# Altium PCB STLinkUART.PcbDoc
Units mil, origin at the board's own origin, x right, y up, seen from the top; angles counter-clockwise.
Board outline 1982 x 570.55 mil, 2 copper layers (Top Layer, Bottom Layer); 66 components, 52 nets, 253 pads, 75 vias.
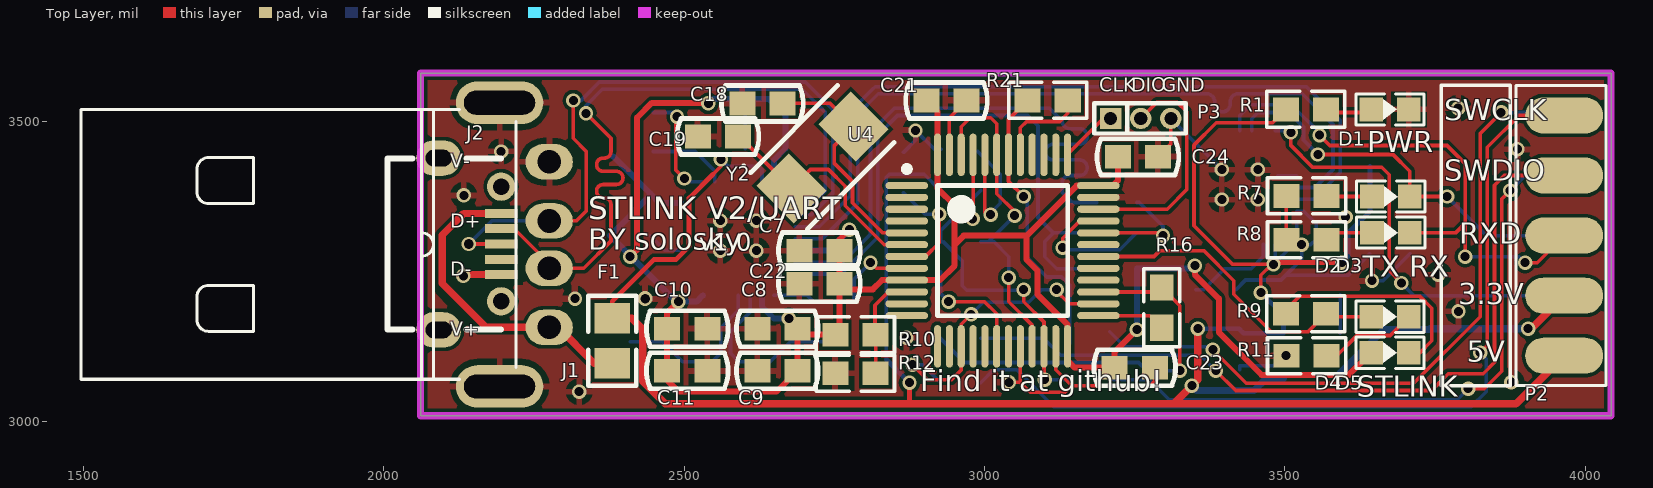
[diagram p0: Top Layer view]
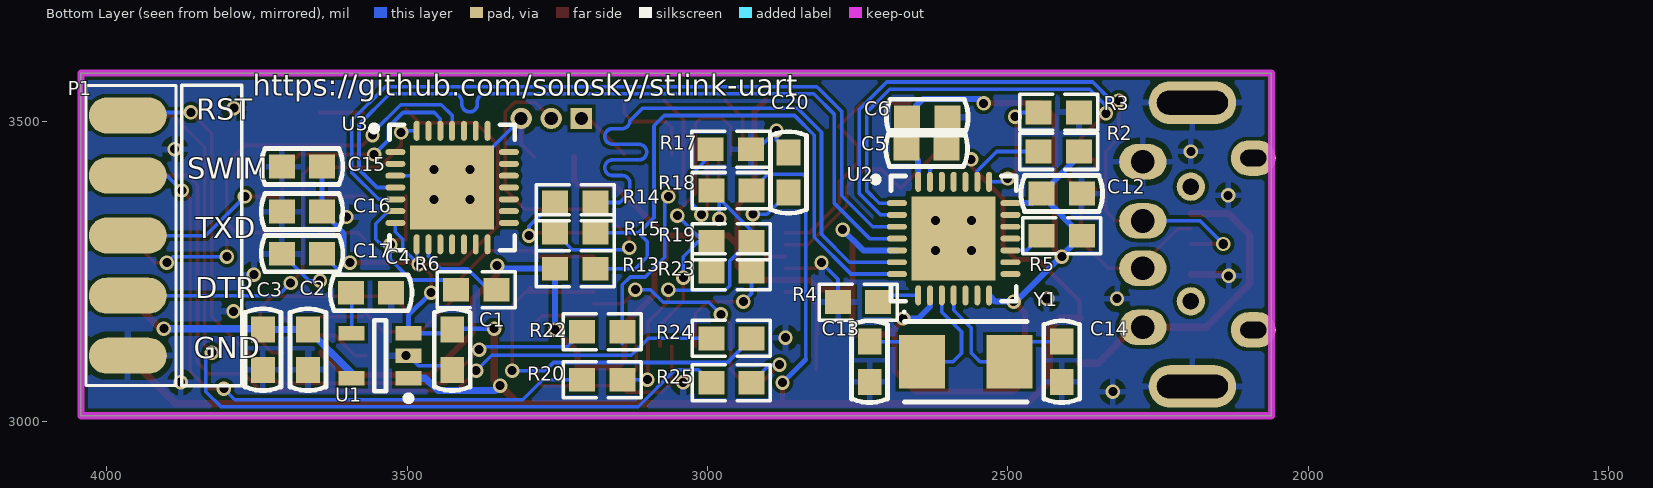
[diagram p1: Bottom Layer view, seen from below]
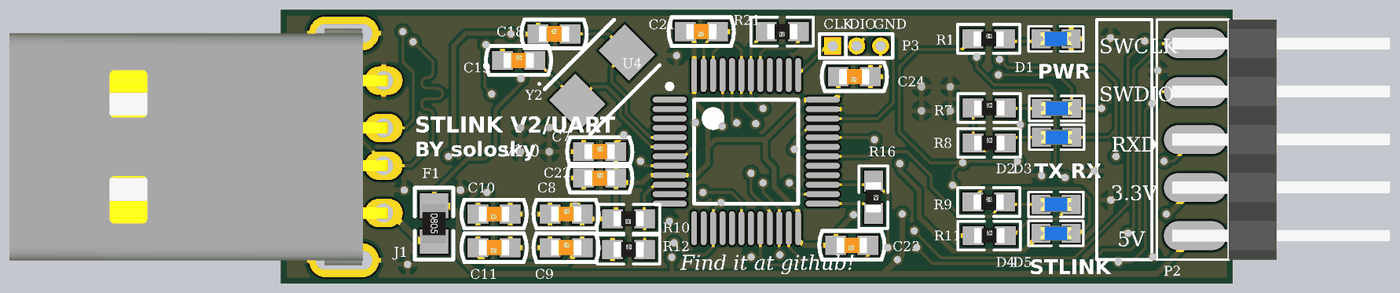
[diagram p2: 3D render of the assembled board from above, using the file's embedded part models]
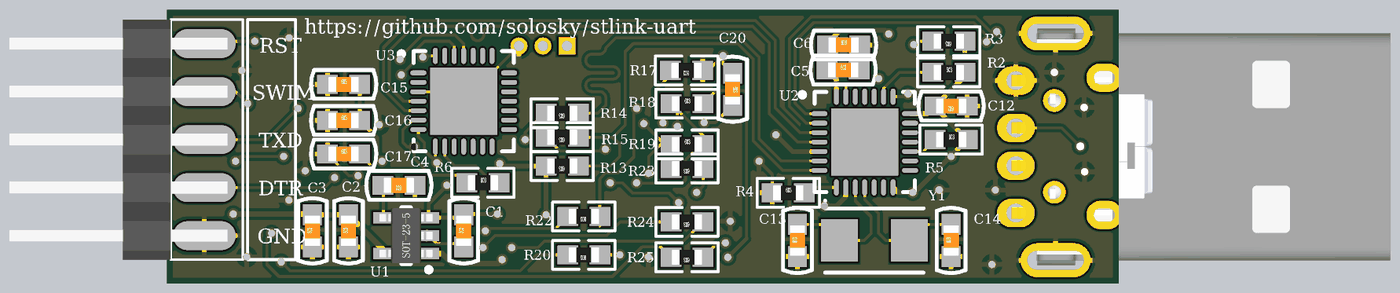
[diagram p3: 3D render of the assembled board from below, using the file's embedded part models]

## Layer stack, top to bottom
Top Solder: solder mask 0.4, Solder Resist, Dk 3.5
Top Layer: signal copper 1.4
Dielectric 1: dielectric 12.6, FR-4, Dk 4.8
Bottom Layer: signal copper 1.4
Bottom Solder: solder mask 0.4, Solder Resist, Dk 3.5

## Board outline
2061,3010 4043,3010 4043,3580.55 2061,3580.55

## Design rules (kind name [scope] priority, off if disabled: settings)
Clearance [All] p1: gap=6
ComponentClearance [All] p1 off: gap=10 collisioncheckmode=3 verticalgap=10 showdistances=FALSE
DiffPairsRouting [All] p1: maxlimit=10 minlimit=6 mostfreqgap=6 toplayer_minwidth=6 toplayer_maxwidth=15 toplayer_prefwidth=6 bottomlayer_minwidth=6 bottomlayer_maxwidth=15 bottomlayer_prefwidth=6 maxuncoupledlength=500
Height [All] p1 off: minheight=0 maxheight=1000 prefheight=500
MatchedLengths USB [InNetClass('USB')] p1: tolerance=5 checknetsindiffpair=TRUE checkdiffpairvsdiffpair=TRUE checkothers=TRUE
MinimumSolderMaskSliver [All] p1: minsoldermaskwidth=3
PolygonConnect [All] p1: connectstyle=Relief reliefconductorwidth=10 reliefentries=4 polygonreliefangle="90 Angle" airgapwidth=10
RoutingVias [All] p1: holewidth=15 width=24 viastyle="Through Hole" minholewidth=15 minwidth=24 maxholewidth=15 maxwidth=24
SilkToSilkClearance [All] p1: silktosilkclearance=1
SilkToSolderMaskClearance [IsPad] p1: minsilkscreentomaskgap=1 clearancetoexposedcopper=TRUE
SolderMaskExpansion [All] p1: expansion=4
UnpouredPolygon [All] p1: allowunpoured=FALSE
Width [All] p1: maxlimit=12 minlimit=6 preferedwidth=6
23 further rules are at their usual default settings.

## Classes and differential pairs
net class USB: D0_N D0_P D1_N D1_P D2_N D2_P
component class USBHost: C1 C2 C3 C4 C5 C6 C7 C8 C9 C10 C11 C12 C13 C14 D1 F1 J1 J2 P1 P2 P3 R1 R2 R3 R4 R5 U1 U2 Y1
component class UART: C15 C16 C17 D2 D3 R6 R7 R8 U3
component class STLink: C18 C19 C20 C21 C22 C23 C24 D4 D5 R9 R10 R11 R12 R13 R14 R15 R16 R17 R18 R19 R20 R21 R22 R23 R24 R25 U4 Y2
differential pair D2: +D2_P -D2_N
differential pair D1: +D1_P -D1_N
differential pair D0: +D0_P -D0_N

## Components (designator, comment, footprint, x,y, rotation, side; value= is the part's Value field where it differs from the comment)
C1 "Cap" C-0603 3425,3120 r90 bottom
C2 "Cap" C-0603 3665,3120 r90 bottom
C3 "Cap" C-0603 3740,3120 r90 bottom
C4 "Cap" C-0603 3560,3215 r0 bottom
C5 "Cap" C-0603 2635,3455 r180 bottom
C6 "Cap Pol1" C-0603 2634,3507 r180 bottom
C7 "Cap" C-0603 2725,3285 r0 top
C8 "Cap" C-0603 2655,3155 r0 top
C9 "Cap" C-0603 2655,3085 r0 top
C10 "Cap" C-0603 2505,3155 r180 top
C11 "Cap" C-0603 2505,3085 r180 top
C12 "Cap" C-0603 2410,3380 r0 bottom
C13 "Cap" C-0603 2730,3100 r90 bottom
C14 "Cap" C-0603 2410,3100 r90 bottom
C15 "Cap" C-0603 3675,3425 r180 bottom
C16 "Cap" C-0603 3675,3350 r180 bottom
C17 "Cap" C-0603 3675,3280 r180 bottom
C18 "Cap" C-0603 2630,3530 r0 top
C19 "Cap" C-0603 2556,3475 r0 top
C20 "Cap" C-0603 2865,3415 r270 bottom
C21 "Cap" C-0603 2936.54,3535 r180 top
C22 "Cap" C-0603 2725,3230 r0 top
C23 "Cap" C-0603 3250,3090 r180 top
C24 "Cap" C-0603 3255.19,3441 r180 top
D1 "PWR" SMT_LED_0603 3675,3520 r0 top
D2 "TXD" SMT_LED_0603 3676.5,3375 r0 top
D3 "RXD" SMT_LED_0603 3676.5,3315 r0 top
D4 "LED" SMT_LED_0603 3675,3175 r0 top
D5 "LED" SMT_LED_0603 3675,3115 r0 top
F1 "Fuse1" 0805-1 2380,3135 r270 top
J1 "USB" USB-B 2220,3295 r90 top
J2 "USB_M" USB_MICRO_5S_B 2195,3296 r90 top
P1 "Header 5" "HEADER 5" 3965,3510 r270 bottom
P2 "Header 5" "HEADER 5" 3965,3110 r90 top
P3 "Header 3" SIP3-1.27 3260,3505 r180 top
R1 "Res2" 0603-1 3535,3520 r0 top
R2 "Res2" 0603-1 2415,3450 r180 bottom
R3 "Res2" 0603-1 2415,3515 r0 bottom
R4 "Res1" 0603-1 2749.06,3199.32 r180 bottom
R5 "Res2" 0603-1 2410,3310 r180 bottom
R6 "Res2" 0603-1 3385,3220 r180 bottom
R7 "Res2" 0603-1 3536,3376 r0 top
R8 "Res2" 0603-1 3536,3303 r0 top
R9 "Res2" 0603-1 3535,3180 r0 top
R10 "Res2" 0603-1 2785,3145 r180 top
R11 "Res2" 0603-1 3536,3110 r0 top
R12 "Res2" 0603-1 2785,3081 r0 top
R13 "Res2" 0603-1 3220,3255 r0 bottom
R14 "Res2" 0603-1 3220,3365 r0 bottom
R15 "Res2" 0603-1 3220,3315 r0 bottom
R16 "Res2" 0603-1 3295,3190 r270 top
R17 "Res2" 0603-1 2961,3454 r0 bottom
R18 "Res2" 0603-1 2960,3385 r180 bottom
R19 "Res2" 0603-1 2960,3300 r180 bottom
R20 "Res2" 0603-1 3175,3070 r0 bottom
R21 "Res2" 0603-1 3105,3535 r180 top
R22 "Res2" 0603-1 3175,3150 r0 bottom
R23 "Res2" 0603-1 2960,3250 r0 bottom
R24 "Res2" 0603-1 2960,3138.75 r0 bottom
R25 "Res2" 0603-1 2960,3065 r0 bottom
U1 "SPX3819" SOT23-5 3545,3110 r0 bottom
U2 "GL852G" QFN28-L 2590,3305 r180 bottom locked
U3 "CP2102/9" QFN28-L 3425,3390 r180 bottom locked
U4 "STM32F103C8T6" LQFP48_N 3030,3285 r0 top locked
Y1 "XTAL" "XAL5032 2-Leads" 2570,3100 r180 bottom
Y2 "8M" "XAL5032 2-Leads" 2730,3440 r45 top

## Footprints (in the part's own frame and the unit in brackets; to place one, negate y for a bottom-side part, rotate by r counter-clockwise, add the part's x,y. Pads: shape width x height; smd on the part's side, far side on the other; paste and mask are expansions set on the pad)
0603-1 [mm] "0603带丝印"
  rect 1.1x1 smd: 1(-0.85,0) 2(0.85,0)
  silkscreen extent -1.65,-0.76 1.65,0.76, body extent -0.8,-0.4 0.8,0.4, height 0.3
0805-1 [mm] "0805带丝印"
  rect 1.3x1.5 smd: 1(-0.95,0) 2(0.95,0)
  silkscreen extent -1.91,-1.02 1.91,1.02, body extent -1,-0.62 1,0.63, height 0.5
C-0603 [mm] "贴片电容"
  rect 1.1x1 smd: 1(-0.85,0) 2(0.85,0)
  silkscreen extent -1.73,-0.76 1.73,0.76, body extent -0.8,-0.4 0.8,0.4, height 0.3
"HEADER 5" [mil]
  oval 60x130 smd: 1(0,0) 2(100,0) 3(200,0) 4(300,0) 5(400,0)
  silkscreen extent -50,-70 450,80, body extent -50,-406 450,48, height 70
LQFP48_N [mm] "Thin QFP, 48-Leads, Body 7x7mm, Pitch 0.5mm, IPC Medium Density"
  oval 1.8x0.3 smd: 1(-4.05,2.75) 2(-4.05,2.25) 3(-4.05,1.75) 4(-4.05,1.25) 5(-4.05,0.75) 6(-4.05,0.25) 7(-4.05,-0.25) 8(-4.05,-0.75) 9(-4.05,-1.25) 10(-4.05,-1.75) 11(-4.05,-2.25) 12(-4.05,-2.75) 25(4.05,-2.75) 26(4.05,-2.25) 27(4.05,-1.75) 28(4.05,-1.25) 29(4.05,-0.75) 30(4.05,-0.25) 31(4.05,0.25) 32(4.05,0.75) 33(4.05,1.25) 34(4.05,1.75) 35(4.05,2.25) 36(4.05,2.75)
  oval 0.3x1.8 smd: 13(-2.75,-4.05) 14(-2.25,-4.05) 15(-1.75,-4.05) 16(-1.25,-4.05) 17(-0.75,-4.05) 18(-0.25,-4.05) 19(0.25,-4.05) 20(0.75,-4.05) 21(1.25,-4.05) 22(1.75,-4.05) 23(2.25,-4.05) 24(2.75,-4.05) 37(2.75,4.05) 38(2.25,4.05) 39(1.75,4.05) 40(1.25,4.05) 41(0.75,4.05) 42(0.25,4.05) 43(-0.25,4.05) 44(-0.75,4.05) 45(-1.25,4.05) 46(-1.75,4.05) 47(-2.25,4.05) 48(-2.75,4.05)
  silkscreen extent -4.17,-2.75 2.75,3.57, body extent -3.5,-3.5 3.5,3.5, height 1.6
QFN28-L [mm] "QFN, 28-Leads, Body 5.00x5.00mm, Pitch 0.50mm, Thermal Pad 3.55x3.55mm, IPC Medium Density"
  oval 0.85x0.25 smd: 1(-2.4,1.5) 2(-2.4,1) 3(-2.4,0.5) 4(-2.4,0) 5(-2.4,-0.5) 6(-2.4,-1) 7(-2.4,-1.5) 15(2.4,-1.5) 16(2.4,-1) 17(2.4,-0.5) 18(2.4,0) 19(2.4,0.5) 20(2.4,1) 21(2.4,1.5)
  oval 0.25x0.85 smd: 8(-1.5,-2.4) 9(-1,-2.4) 10(-0.5,-2.4) 11(0,-2.4) 12(0.5,-2.4) 13(1,-2.4) 14(1.5,-2.4) 22(1.5,2.4) 23(1,2.4) 24(0.5,2.4) 25(0,2.4) 26(-0.5,2.4) 27(-1,2.4) 28(-1.5,2.4)
  rect 3.55x3.55 smd: 29(0,0)
  silkscreen extent -3.43,-2.65 2.65,2.65, body extent -2.5,-2.5 2.5,2.5, height 0.8
SIP3-1.27 [mm]
  rect 0.9x0.9 hole 0.55: 1(1.27,0)
  round 0.9 hole 0.55: 2(0,0) 3(-1.27,0)
  silkscreen extent -1.91,-0.64 1.97,0.64
SMT_LED_0603 [mm] "SMT LED"
  rect 1x1 smd: 1(-0.8,0) 2(0.8,0)
  silkscreen extent -1.45,-0.66 1.45,0.66, body extent -0.81,-0.4 0.81,0.4, height 0.6
SOT23-5 [mm] "Max4173"
  rect 1.1x0.6 smd: 1(-1.2,0.95) 2(-1.2,0) 3(-1.2,-0.95) 4(1.2,-0.95) 5(1.2,0.95)
  silkscreen extent -1.32,-1.5 0.25,1.92, body extent -1.4,-1.45 1.4,1.45, height 1.2
USB-B [mm]
  oval 1.5x2 hole 1: 1(-3.5,-1.4) 2(-1,-1.4) 3(1,-1.4) 4(3.5,-1.4)
  oval 1.8x3.7 hole 1 slot 3 at 90 deg: 5(6,0.7) 6(-6,0.7)
  silkscreen extent -5.69,0 5.71,18.4, body extent -6.25,-1.63 6.25,18.4, height 4.52
USB_MICRO_5S_B [mil] "USB Micro SMT 5S B"
  rect 15x54 smd: 1(51,0) 2(25.5,0) 3(0,0) 4(-25.5,0) 5(-51,0)
  oval 59.06x74.8 hole 27.56 slot 43.31 at 90 deg: 6(-143,104) 7(143,104)
  round 47.24 hole 27.5: 8(95.5,0) 9(-95.5,0)
  silkscreen extent -143,0 143,189, body extent -161,-9 161,204, height 105
"XAL5032 2-Leads" [mm] "DFN, 2-Leads, Body 3.20x5.00mm, Pitch 3.70mm, IPC Low Density"
  rect 1.95x2.25 smd: 1(-1.85,0) 2(1.85,0)
  silkscreen extent -2.65,-1.7 2.6,2.15, body extent -2.6,-1.7 2.6,1.7, height 0.45

## Part data
C1 C2 C3 C4 C5 C7 C8 C9 C10 C11 C12 C13 C14 C15 C16 C17 C21 C22 C23 C24: "Capacitor"
C6: "Polarized Capacitor (Radial)"
D1 D2 D3: library part LED2, "Typical RED, GREEN, YELLOW, AMBER GaAs LED"
D4 D5: "LED 发光二极管"
F1: "保险丝"
J1: "USB接口"
J2: "Micro/Mini USB"
P1 P2: "Header, 5-Pin"
P3: "Header, 3-Pin"
R1 R2 R3 R5 R6 R7 R8 R9 R10 R11 R12 R13 R14 R15 R16 R17 R18 R19 R20 R21 R22 R23 R24 R25: "Resistor"
R4: "贴片电阻"
U4: "STM32 ARM-based 32-bit MCU with 64 Kbytes Flash, 48-pin LQFP, Industrial Temperature"
Y1: "Crystal Oscillator"
Y2: library part XTAL

## Via types
v1: diameter 24, hole 15, Top Layer to Bottom Layer, tented both sides, 73 vias
v2: diameter 24, hole 16, Top Layer to Bottom Layer, tented both sides, 1 vias
v3: diameter 25, hole 16, Top Layer to Bottom Layer, tented both sides, 1 vias

## Nets (pads, with @x,y where several pads share a name; then routed paths per layer and width w, separated by ;. In a path a pad name is that pad's centre, name@x,y a point inside that pad or via, vN(x,y) a via of type N, cw(c..) or ccw(c..) an arc to the next point about the centre after c; other vN are vias at no path point)
3.3V: C5.1 C6.1 C7.2 C8.2 C9.2 C10.2 C11.2 C12.2 C21.2 C22.2 C23.2 C24.2 D5.1 R2.2 R5.2 R10.2 R13.2 U2.5 U2.9 U2.14 U2.21 U2.28 U4.9 U4.24 U4.36 U4.48 | length 3865.8
  Top Layer w10: v1(2410,3275) 2421.22,3286.22 2421.22,3506.22 2446,3531 2539,3531 v1(2540,3530) ; v1(2490,3200) 2471.54,3181.54 C10.2 C11.2 2471.54,3069.2 2490.73,3050 2653.46,3050 C9.2 C8.2 ; v1(2674,3172) 2674,3169.46 C8.2 ; v1(2775,3320) 2758.46,3303.46 C7.2 C22.2 ; C21.2 2921.73,3516.34 U4.48 2921.73,3388.27 2950,3360 2950,3295 ; C24.2 3221.73,3401.73 3213.27,3393.27 U4.36 3153.27,3393.27 3070,3310 ; v1(3253.46,3153.46) 3216.54,3116.54 C23.2 3150,3090 3138.27,3101.73 U4.24 3138.27,3161.73 3088,3212 3088,3252 3070,3270 3070,3310 ; v1(3350,3260) 3350,3245 3390,3205 3390,3149 3461,3078 3606.5,3078 D5.1 ; C8.2 2698.46,3145 R10.2 2761.54,3145 2758.46,3148.07 C22.2 ; C22.2 2768.07,3220.39 2813.86,3220.39 2829.25,3235.79 U4.9 2925.79,3235.79 2950,3260 2950,3295 ; 2950,3295 2965,3310 3070,3310
  Bottom Layer w10: R2.2@2381.54,3441.93 C12.2 2459.41,3364.06 U2.21 ; C12.2@2443.46,3376.93 R5.2 2486.54,3200 v1(2490,3200) 2520.43,3200 U2.14 ; v1(2540,3530) 2547.69,3537.69 2640.78,3537.69 2668.46,3510 C5.1 2649.06,3435.59 U2.28 ; U2.9 2629.37,3191.63 2649,3172 v1(2674,3172) ; U2.5 2740.32,3285.32 v1(2775,3320) ; v1(3253.46,3153.46) R13.2 3345,3255 v1(3350,3260)
3.3V2: C17.2 R6.1 R7.1 R8.1 U3.6 | length 506.9
  Top Layer w6: R7.1 R8.1 3520,3303 v1(3528,3295)
  Bottom Layer w6: R6.1 3434.46,3236 3493.47,3236 3501.15,3243.69 ; U3.6 3531.3,3350.63 3552,3329.93 3552,3304 3543,3295 v1(3528,3295) 3528,3270.53 3501.15,3243.69 ; C17.2 3605.22,3243.69 3501.15,3243.69
3.3V_OUT: C2.2 C3.2 P2.2 U1.5 | length 434.4
  Top Layer w6: v1(3905,3155) v1@3910,3155
  Top Layer w12: v1@3910,3155 P2.2
  Bottom Layer w6: U1.5 U1.5@3592.24,3080.71 ; C3.2 C3.2@3741.54,3155
  Bottom Layer w12: U1.5@3592.24,3080.71 C2.2 C3.2 ; C3.2@3741.54,3155 v1(3905,3155)
BOOT0: R17.2 U4.44 | length 234.7
  Top Layer w6: U4.44 3000.47,3347.79 3003.26,3345 v1(3010,3345)
  Bottom Layer w6: R17.2@2988.46,3450 2989.46,3449 3026.19,3412.28 3026.19,3363.66 3010,3347.47 v1(3010,3345)
D0_N: J1.2 J2.2 U2.1 | length 1187
  Top Layer w6: J2.2 2216.73,3321.5 2275.12,3263.11 J1.2 ; J1.2@2279.24,3259.76 2283.37,3255.63 2332.63,3255.63 2378,3301 2378,3354 2378,3362 ccw(c2367,3362) 2367,3373 2365,3373 cw(c2365,3384) 2354,3384 cw(c2365,3384) 2365,3395 2378,3395 2387,3395 ccw(c2387,3406) 2398,3406 ccw(c2387,3406) 2387,3417 2378,3417 2365,3417 cw(c2365,3428) 2354,3428 cw(c2365,3428) 2365,3439 2367,3439 ccw(c2367,3450) 2378,3450 2378,3461 2378,3472 v1(2336.36,3513.64)
  Bottom Layer w6: v1(2336.36,3513.64) 2336.36,3526.36 2363.65,3553.65 2696.35,3553.65 2735,3515 2735,3385 2714.06,3364.06 U2.1
D0_P: J1.3 J2.3 U2.2 | length 1161.4
  Top Layer w6: v2(2141,3296) J2.3 ; J1.3 2320.37,3334.37 2337,3351 2337,3450 2315.15,3471.85 v1(2315.15,3534.85)
  Bottom Layer w6: v2(2141,3296) 2179.37,3334.37 J1.3 J1.3@2290.12,3334.37 ; v1(2315.15,3534.85) 2327.88,3534.85 2358.68,3565.65 2701.32,3565.65 2747,3519.97 2747,3380.03 2743.49,3376.51 2711.34,3344.37 U2.2
D1_N: U2.3 U3.5 | length 1287.4
  Bottom Layer w6: U2.3 2724.69,3324.69 2776.51,3376.51 2776.51,3516.51 2813.49,3553.49 2818,3558 3536,3558 3592,3502 3592,3415.03 3547.29,3370.32 U3.5
D1_P: U2.4 U3.4 | length 1288.8
  Bottom Layer w6: U2.4 2730,3305 2788.51,3363.51 2788.51,3511.54 2822.97,3546 3344,3546 3357,3546 3370,3546 cw(c3370,3533) 3383,3533 3383,3529 ccw(c3396,3529) 3396,3516 ccw(c3396,3529) 3409,3529 3409,3533 cw(c3422,3533) 3422,3546 3435,3546 3456,3546 3529,3546 3580,3495 3580,3420 3550,3390 U3.4
D2_N: R14.1 U2.6 | length 1021.9
  Bottom Layer w6: U2.6 2763.66,3265.63 2810,3311.97 2810,3481.97 2850.03,3522 3108,3522 3129,3501 ccw(c3142,3501) 3142,3488 3158,3488 cw(c3158,3475) 3171,3475 cw(c3158,3475) 3158,3462 3129,3462 3114,3462 ccw(c3114,3449) 3101,3449 ccw(c3114,3449) 3114,3436 3129,3436 3158,3436 cw(c3158,3423) 3171,3423 cw(c3158,3423) 3158,3410 3142,3410 ccw(c3142,3397) 3129,3397 3129,3384 3129,3382 3146,3365 R14.1
D2_P: R13.1 R15.1 U2.7 | length 1022.4
  Bottom Layer w6: U2.7 2760.94,3245.94 2822,3307 2822,3477 2855,3510 3072,3510 3089,3493 3089,3340 3114,3315 3115,3315 ; R13.1 3120,3255 3100,3275 3100,3300 3115,3315 ; R15.1 3115,3315
DTR: P1.4 U3.28 | length 701.3
  Top Layer w6: v1(3510,3482) 3510,3460 3546,3424 3661,3424 3673.69,3411.31 3673.69,3251.31 v1(3694,3231)
  Bottom Layer w6: U3.28 3507.51,3484.49 v1(3510,3482) ; v1(3694,3231) 3715,3210 P1.4
GND: C1.1 C2.1 C3.1 C4.1 C5.2 C6.2 C7.1 C8.1 C9.1 C10.1 C11.1 C12.1 C13.1 C14.1 C15.1 C16.1 C17.1 C18.1 C19.1 C20.1 C21.1 C22.1 C23.1 C24.1 D1.2 J1.4 J1.5 J1.6 J2.5 P1.5 P3.3 R3.1 R4.1 R11.1 R12.1 R17.1 U1.2 U2.29 U3.3 U3.29 U4.8 U4.20 U4.23 U4.35 U4.47 | length 1272.1
  Top Layer w6: v1(2132,3243) v1@2134,3245 ; v1(2810,3265) 2819.53,3255.47 U4.8 ; U4.47 2941.42,3506.42 C21.1 ; v1(3040.47,3065.47) 3059.53,3065.47 ; U4.20 3059.53,3065.47 ; U4.23 3118.58,3086.42 3145,3060 ; C23.1 3283.46,3068.46 3275,3060 3145,3060 ; C24.1 3310,3462.35 P3.3 ; 3059.53,3065.47 3076,3049 3134,3049 3145,3060
  Top Layer w12: v1@2134,3245 J2.5
  Bottom Layer w6: C5.2 C6.2@2601.54,3510 ; R4.1 2782.52,3237.52 v1(2810,3265) ; C20.1 2885,3468.46 v1(2885,3485) 2916,3454 R17.1 ; P3.3 v1(3395,3420) ; C1.1 3425,3093.41 3481.16,3093.41 U1.2 ; U3.29@3487.99,3409.69 U3.3 ; v1(3645,3235) 3663.46,3235 C17.1
  other v1: 2325,3050 3877,3066 3501.54,3110 2870,3140 3789,3184 2318,3205 3755,3245 2560,3285 2620,3285 2560,3335 2620,3335 3601,3341 3395,3370 3455,3370 2133,3377 3455,3420 2195,3450 3887,3454 3788.4,3522.11
  other v3: 2435,3205
NetC4_2: C4.2 U1.4 | length 63.8
  Bottom Layer w6: U1.4 C4.2@3592.24,3211.22
NetC13_2: C13.2 U2.10 Y1.1 | length 282.7
  Bottom Layer w6: U2.10 2609.69,3182.69 2577,3150 2577,3114 2591,3100 Y1.1 2676.3,3133.46 C13.2
NetC14_2: C14.2 U2.11 Y1.2 | length 278.6
  Bottom Layer w6: C14.2 2463.7,3133.46 Y1.2 2546,3100 2561,3115 2561,3156.63 2590,3185.63 U2.11
NetC20_2: C20.2 U4.7 | length 185.1
  Top Layer w6: U4.7 2901.48,3275.16 2924.38,3298.07 v1(2924.38,3345.62)
  Bottom Layer w6: C20.2 2900.92,3345.62 v1(2924.38,3345.62)
NetD1_1: D1.1 R1.2 | length 71.5
  Top Layer w6: R1.2@3573.46,3515 3643.5,3515 D1.1@3645,3515
NetD2_1: D2.1 R7.2 | length 76
  Top Layer w6: R7.2 3570.46,3375 D2.1
NetD3_1: D3.1 R8.2 | length 80.5
  Top Layer w6: R8.2 3581.46,3315 D3.1
NetD4_2: D4.2 R11.2 | length 165
  Top Layer w6: R11.2@3568.46,3110 3586.41,3110 3620.09,3143.69 3675.18,3143.69 D4.2
NetD5_2: D5.2 R9.1 | length 367.6
  Top Layer w6: R9.1 3501.54,3186.54 3523.69,3208.69 3724.91,3208.69 3744.7,3188.9 3744.7,3134.7 3725,3115 D5.2
NetR2_1: R2.1 U2.23 | length 133.7
  Bottom Layer w6: R2.1 2518.3,3450 2550.63,3417.67 U2.23
NetR3_2: R3.2 U2.22 | length 187.7
  Top Layer w6: v1(2487.94,3507.94) 2485.88,3505.88 2485.88,3419.12 v1(2500,3405)
  Bottom Layer w6: R3.2 2485,3515 2487.94,3512.06 v1(2487.94,3507.94) ; v1(2500,3405) 2505.51,3399.49 U2.22
NetR4_2: R4.2 U2.8 | length 71.2
  Bottom Layer w6: U2.8 2704.4,3210.51 R4.2
NetR5_1: R5.1 U2.17 | length 62.3
  Bottom Layer w6: R5.1 2468.15,3285.32 U2.17
NetR6_2: R6.2 U3.9 | length 155.9
  Bottom Layer w6: R6.2 3364.4,3220 3399.4,3255 3444,3255 3464.37,3275.37 U3.9
NetR10_1: R10.1 R12.2 U4.10 | length 169.2
  Top Layer w6: R10.1@2817.54,3145 2817.54,3194.01 2839.63,3216.1 U4.10 ; R12.2@2818.46,3087 R10.1
NetR14_2: R14.2 U4.32 | length 184.8
  Top Layer w6: U4.32 3292.47,3314.53 v1(3297,3310)
  Bottom Layer w6: R14.2 3257.53,3365 3297,3325.53 v1(3297,3310)
NetR15_2: R15.2 U4.33 | length 223.8
  Top Layer w6: v1(3130,3290) 3130,3305.69 3158.52,3334.21 U4.33
  Bottom Layer w6: v1(3130,3290) 3133.69,3286.31 3224.78,3286.31 R15.2
OS_IN: C18.2 U4.5 Y2.2 | length 397.7
  Top Layer w6: C18.2 2743,3530 Y2.2 2750,3460 2750,3430 2780,3400 2780,3364.53 2830,3314.53 U4.5
OS_OUT: C19.2 U4.6 Y2.1 | length 404.7
  Top Layer w6: C19.2@2583.46,3470 2597,3470 Y2.1 2710,3420 2740,3420 2768,3392 2768,3359.56 2832.72,3294.84 U4.6
P_NRST: R23.2
P_RST: P1.1 R22.2 | length 1159.9
  Top Layer w6: v1(3380,3120) 3380,3119.7 3435.7,3064 3714,3064 3825,3175 3825,3480 v1(3860,3515)
  Bottom Layer w6: R22.2 3233.46,3125 3375,3125 v1(3380,3120) ; v1(3860,3515) 3960,3515 P1.1
P_SWCLK: P2.5 R25.2 | length 1452.4
  Top Layer w6: v1(3825,3115) 3837,3127 3837,3457 3890,3510 P2.5
  Bottom Layer w6: R25.2 3014.94,3086.47 3053.83,3086.47 3115.4,3024.91 3809.91,3024.91 3835,3050 3835,3105 v1(3825,3115)
P_SWDIO: P2.4 R24.2 | length 1328.6
  Top Layer w6: v1(3385,3085) 3418,3052 3743.97,3052 3771.97,3080 3830,3080 3849,3099 3849,3394 3865,3410 P2.4
  Bottom Layer w6: R24.2 3098.72,3138.75 3126.78,3110.69 3359.31,3110.69 v1(3385,3085)
P_SWIM: P1.2 R20.2 | length 1092.9
  Top Layer w6: v1(3805,3055) 3831.97,3055 3861,3084.03 3861,3371 v1(3875,3385)
  Bottom Layer w6: R20.2 3274.34,3070 3307.44,3036.91 3786.91,3036.91 v1(3805,3055) ; v1(3875,3385) 3900,3410 P1.2
RTS: U3.24
RXD: D3.2 P2.3 U3.25 | length 891.9
  Top Layer w6: v1(3557.59,3477.11) 3574.7,3460 3770,3460 3800,3430 3800,3330 ; D3.2 3785,3315 3800,3330 ; v1(3800,3275) 3800,3330 ; v1(3900,3265) 3920,3265 P2.3
  Bottom Layer w6: U3.25 3425,3510 3443,3528 3510.67,3528 3557.59,3481.08 v1(3557.59,3477.11) ; v1(3800,3275) 3890,3275 v1(3900,3265)
STA_LED: D4.1 R9.2 U4.30 | length 534.7
  Top Layer w6: U4.30 3282.14,3275.16 3291.99,3285 3365,3285 3415,3235 3415,3212.47 3477.47,3150 3538.46,3150 R9.2 ; R9.2@3573.46,3175 D4.1
SWCLK0: P3.1 U4.37 | length 96.3
  Top Layer w6: U4.37@3138.27,3445.8 3197.47,3505 P3.1
SWDIO0: P3.2 U4.34 | length 384.5
  Top Layer w6: U4.34 3303.9,3353.9 3336.72,3386.72 3336.72,3516.07 3321.07,3531.72 3286.72,3531.72 P3.2
SWIM: R18.1 R19.2 R20.1 U4.22 U4.45 | length 655.1
  Top Layer w6: v1@2980.79,3338.47 U4.45 ; v1(3065,3220) 3065,3200 3098.9,3166.1 U4.22 3098.9,3071.1 v1(3100,3070)
  Bottom Layer w6: v1(2980,3337.68) R18.1@2980,3371.54 ; R18.1 R18.1@2980,3371.54 ; v1(3065,3220) 3064,3219 2970.4,3219 2962.81,3226.59 2962.81,3267.79 2930.6,3300 R19.2 2926.54,3318.07 R18.1@2980,3371.54 ; v1(3100,3070) R20.1
SWIM_IN: R19.1 U4.21 U4.43 U4.46 | length 565.2
  Top Layer w6: U4.46 2961.1,3491.1 2976.31,3506.31 3010,3506.31 3020.16,3496.16 U4.43 3020.16,3379.84 3050,3350 v1(3050,3343.27) ; v1(3040,3240) 3040,3200 3079,3161 3079,3125.76 U4.21
  Bottom Layer w6: R19.1 R19.1@3006.73,3300 ; v1(3040,3240) 3040,3275 3015,3300 R19.1@3006.73,3300 ; v1(3050,3343.27) R19.1@3006.73,3300
SWIM_RST: R21.2 R22.1 U4.42 | length 474.9
  Top Layer w6: v1(3065,3375) 3039.84,3400.16 U4.42 3039.84,3503.31 R21.2
  Bottom Layer w6: v1(3065,3375) 3071,3369 3071,3273.7 3103.7,3241 3128.7,3241 3141.54,3228.16 R22.1 3141.54,3130
SWIM_RST_IN: R21.1 U4.41 | length 155.5
  Top Layer w6: U4.41 3059.53,3489.53 3070,3500 3125,3500 3138.46,3513.46 R21.1
T_JTCK: R25.1 U4.15 U4.26 | length 500.6
  Top Layer w6: v1(2880,3095) 2905,3070 2945,3070 2961.1,3086.1 U4.15 2961.1,3162.53 v1(2977.57,3179) ; v1(3120,3220) 3117.43,3220 3118.71,3218.71 3141.01,3196.42 U4.26
  Bottom Layer w6: v1(2880,3095) 2896.54,3095 R25.1 ; v1(2977.57,3179) 2997.57,3199 3073.7,3199 3094.7,3220 v1(3120,3220)
T_JTMS: R16.1 R24.1 U4.27 | length 694.9
  Top Layer w6: U4.27 R16.1@3287.64,3216.1 ; v1(3325,3085) 3325,3193.46 R16.1@3302.36,3216.1 ; R16.1@3287.64,3216.1 3295,3216.1 R16.1@3302.36,3216.1 ; R16.1@3287.64,3216.1 R16.1 R16.1@3302.36,3216.1
  Bottom Layer w6: R24.1 2966.6,3098.69 3256.31,3098.69 3270,3085 v1(3325,3085)
T_NRST: R23.1 U4.18 | length 198.4
  Top Layer w6: v1(2940,3200) 3000,3200 3020.16,3179.84 U4.18
  Bottom Layer w6: R23.1 2926.54,3213.46 v1(2940,3200)
T_SWDIO_IN: R16.2 U4.25 | length 113.9
  Top Layer w6: U4.25 3274.8,3176.73 R16.2
TXD: D2.2 P1.3 U3.26 | length 667
  Top Layer w6: v1(3555,3445) 3680,3445 3707.99,3417.01 D2.2 v1(3770,3375)
  Bottom Layer w6: U3.26 3444.69,3504.69 3455,3515 3506.7,3515 3531,3490.7 3531,3469.04 v1(3555,3445) ; v1(3770,3375) 3835,3310 P1.3
VBUS: C1.2 C15.2 C16.2 F1.1 P2.1 R1.1 R18.2 U1.1 U1.3 U2.27 U3.7 U3.8 | length 4147.3
  Top Layer w6: 2547.79,3412.21 2561,3425.42 v1(2561,3437) ; v1(3460,3215) 3460,3244 3478,3262 3413,3262 3348.72,3326.28 3348.72,3460.72 3385.73,3497.73 3479.27,3497.73 R1.1
  Top Layer w8: F1.1 2380,3200.58 2449.42,3270 2486,3270 2508,3292 2508,3372.42 2547.79,3412.21 ; 2875,3030 v1(2875,3065) ; v1@3481,3265 v1(3595,3265)
  Top Layer w12: F1.1 2412.6,3172.4 2431,3154 2431,3067.23 2468.23,3030 2875,3030 3315,3030 ; v1(3355,3155) 3355,3070 v1(3345,3060) 3315,3030 ; P2.1 3885,3030 3315,3030
  Bottom Layer w6: v1(2561,3437) 2572.78,3425.22 2623.61,3425.22 2629.37,3419.46 U2.27 ; 2836.31,3103.69 2836.31,3406.92 2841.59,3412.19 2899.35,3412.19 R18.2 ; v1(3481,3262) v1@3484.06,3265.06 ; U3.8 v1@3484.06,3265.06 ; U3.7 3519.49,3316.19 3507,3303.7 3507,3288 v1@3484.06,3265.06
  Bottom Layer w8: 2836.31,3103.69 v1(2875,3065) ; v1(3355,3155) 3423.46,3155 C1.2 3431.06,3147.4 U1.3 3497.76,3177.24 v1(3460,3215) ; v1(3595,3265) 3605,3275 3605,3313.46 C16.2 C15.2
  Bottom Layer w12: v1(3345,3060) 3353.09,3051.91 3448.68,3051.91 3469.37,3072.6 U1.1
VBUS0: F1.2 J1.1 J2.1 | length 531.8
  Top Layer w12: J2.1 2133,3347 2097,3311 2097,3230 2169.8,3157.2 J1.1 2290.12,3157.2 2349.72,3097.6 F1.2
pads on no net: J2.4 J2.6 J2.7 J2.8 J2.9 U2.12 U2.13 U2.15 U2.16 U2.18 U2.19 U2.20 U2.24 U2.25 U2.26 U3.1 U3.2 U3.10 U3.11 U3.12 U3.13 U3.14 U3.15 U3.16 U3.17 U3.18 U3.19 U3.20 U3.21 U3.22 U3.23 U3.27 U4.1 U4.2 U4.3 U4.4 U4.11 U4.12 U4.13 U4.14 U4.16 U4.17 U4.19 U4.28 U4.29 U4.31 U4.38 U4.39 U4.40

## Polygon pours and split planes (outlines as drawn)
GND on Top Layer "Top Layer" (solid, pour order 6): 2061,3010 4043,3010 4043,3580.55 2061,3580.55
GND on Bottom Layer "Bottom Layer" (solid, pour order 8): 2061,3010 4043,3010 4043,3580.55 2061,3580.55

## Keep-outs
Keep-Out Layer:
  the board outline again, w11.81

## Silkscreen, mask and mechanical layers (free items; w line width, h text height)
Top Overlay:
  lines w6: 3760,3060 3875,3060 3875,3560 3760,3560 3760,3060
  text "CLK" at 3191,3541 h40
  text "DIO" at 3244,3541 h40
  text "GND" at 3295,3541 h40
  text "SWCLK" at 3765,3490 h60
  text "PWR" at 3637,3437 h60
  text "SWDIO" at 3765,3390 h60
  text "STLINK V2/UART" at 2340,3325 h65
  text "RXD" at 3790,3285 h60
  text "BY solosky" at 2340,3275 h60
  text "v1.0" at 2525,3275 h50
  text "TX RX" at 3630,3230 h60
  text "3.3V" at 3789,3184 h60
  text "5V" at 3803,3088 h60
  text "Find it at github!" at 2893,3039 h60
  text "STLINK" at 3620,3030 h60
Bottom Overlay:
  lines w6: 3775,3060 3775,3560 3875,3560 3875,3060 3775,3060
  text "https://github.com/solosky/stlink-uart" at 3757,3531 h60
  text "RST" at 3851,3491 h60
  text "SWIM" at 3866,3393 h60
  text "TXD" at 3852,3294 h60
  text "DTR" at 3853,3194 h60
  text "GND" at 3855,3094 h60

## Text inside footprints (layer, text, board x,y; h text height)
J1: Top Overlay "D-" at 2110,3235 h40; Top Overlay "V-" at 2110,3415 h40; Top Overlay "V+" at 2110,3135 h40; Top Overlay "D+" at 2110,3315 h40